# Altium PCB TimePi.PcbDoc
Units mil, origin at the board's own origin, x right, y up, seen from the top; angles counter-clockwise.
Board outline 3149.61 x 1878.5 mil, 4 copper layers (L01_TOP, L02_PWR, L03_PWR, L04_BOT), stack 70.112 mil thick; 86 components, 91 nets, 270 pads, 126 vias.
Unrouted connection lines stored in the file: 74.
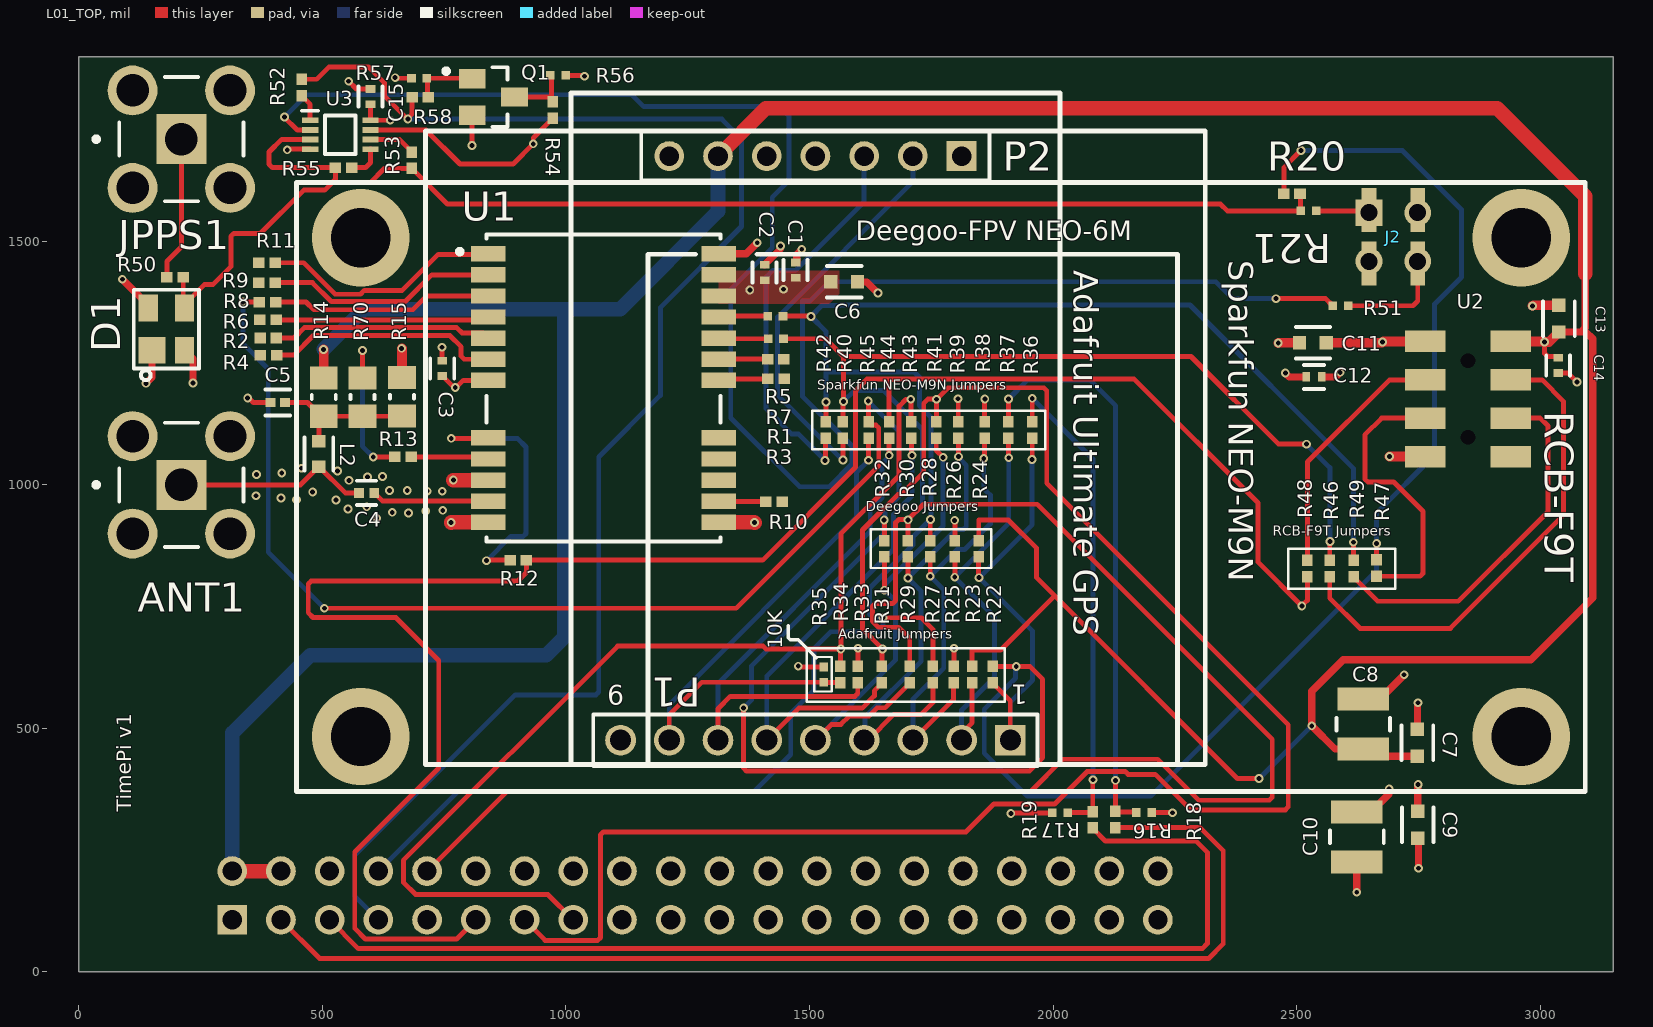
[diagram p0: L01_TOP view]
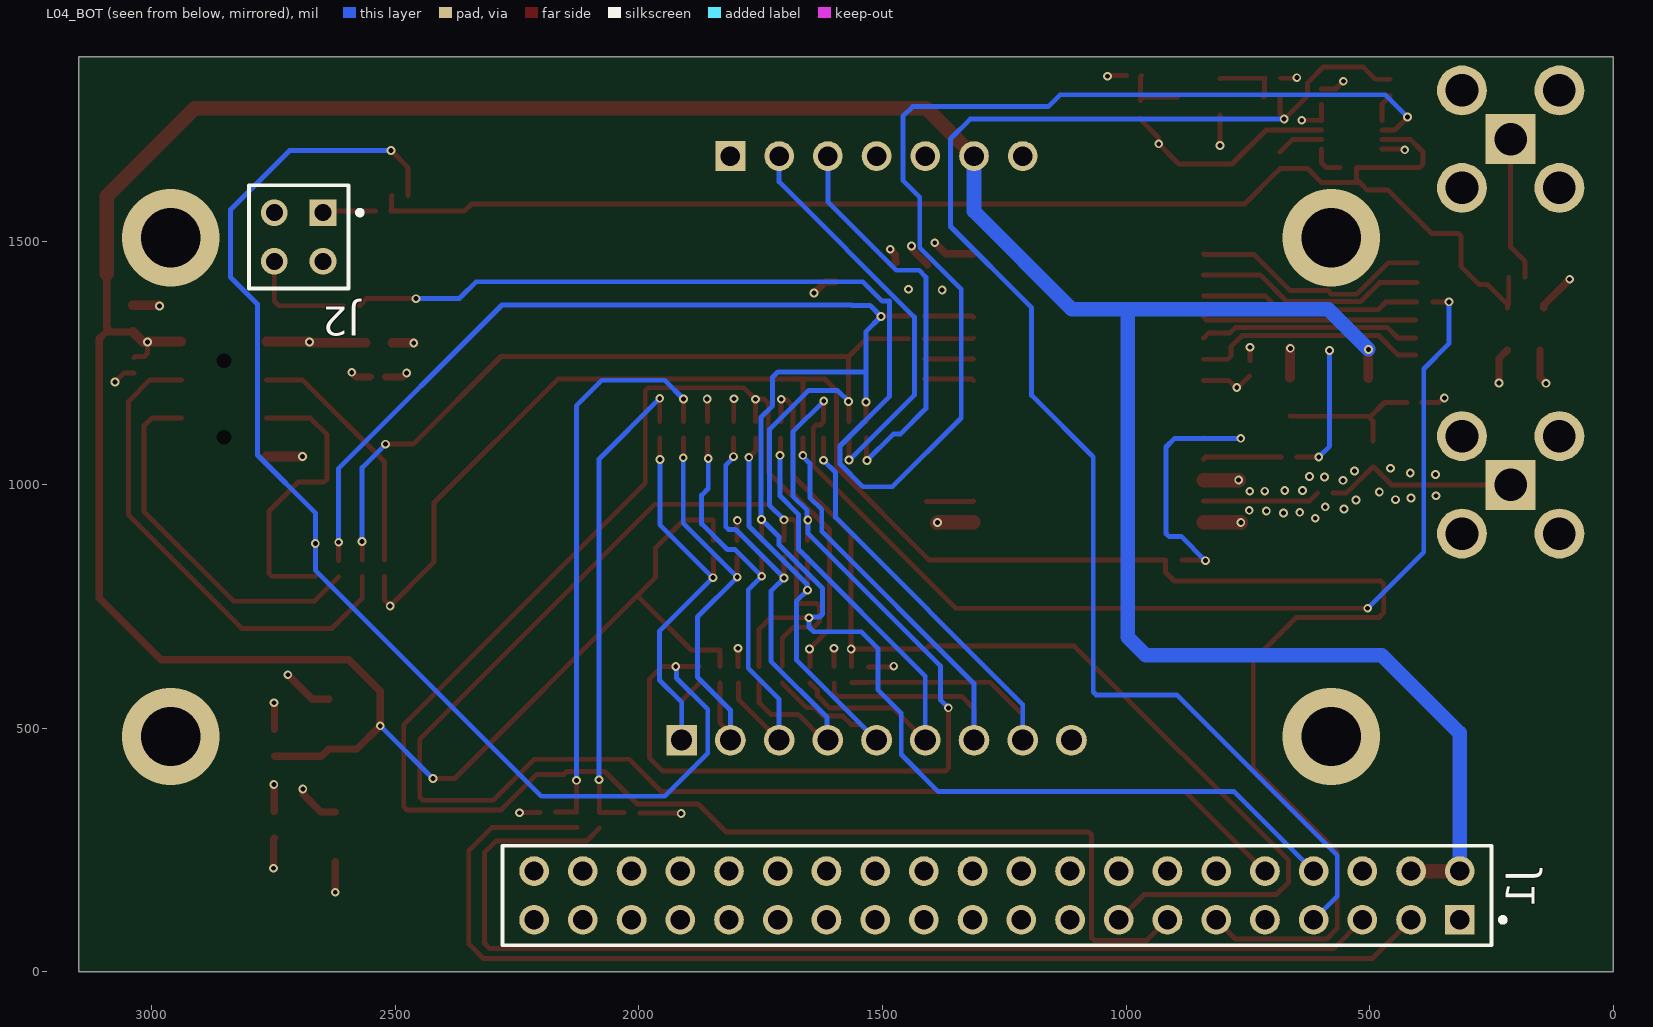
[diagram p1: L04_BOT view, seen from below]
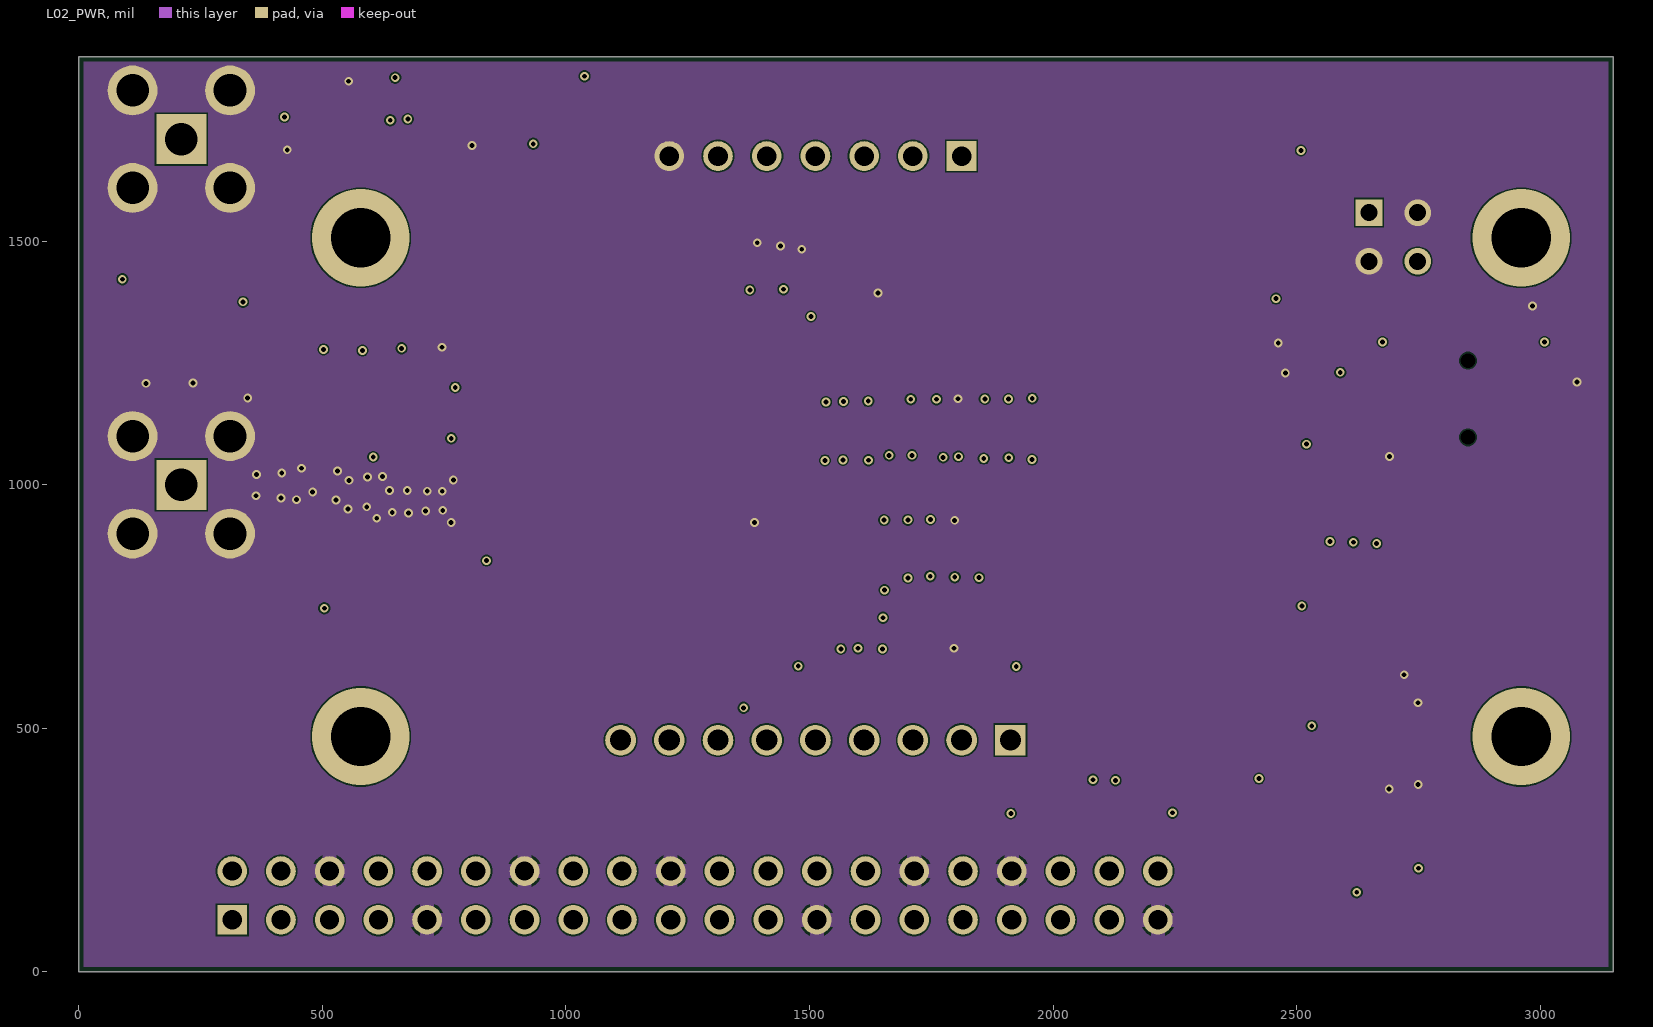
[diagram p2: L02_PWR]
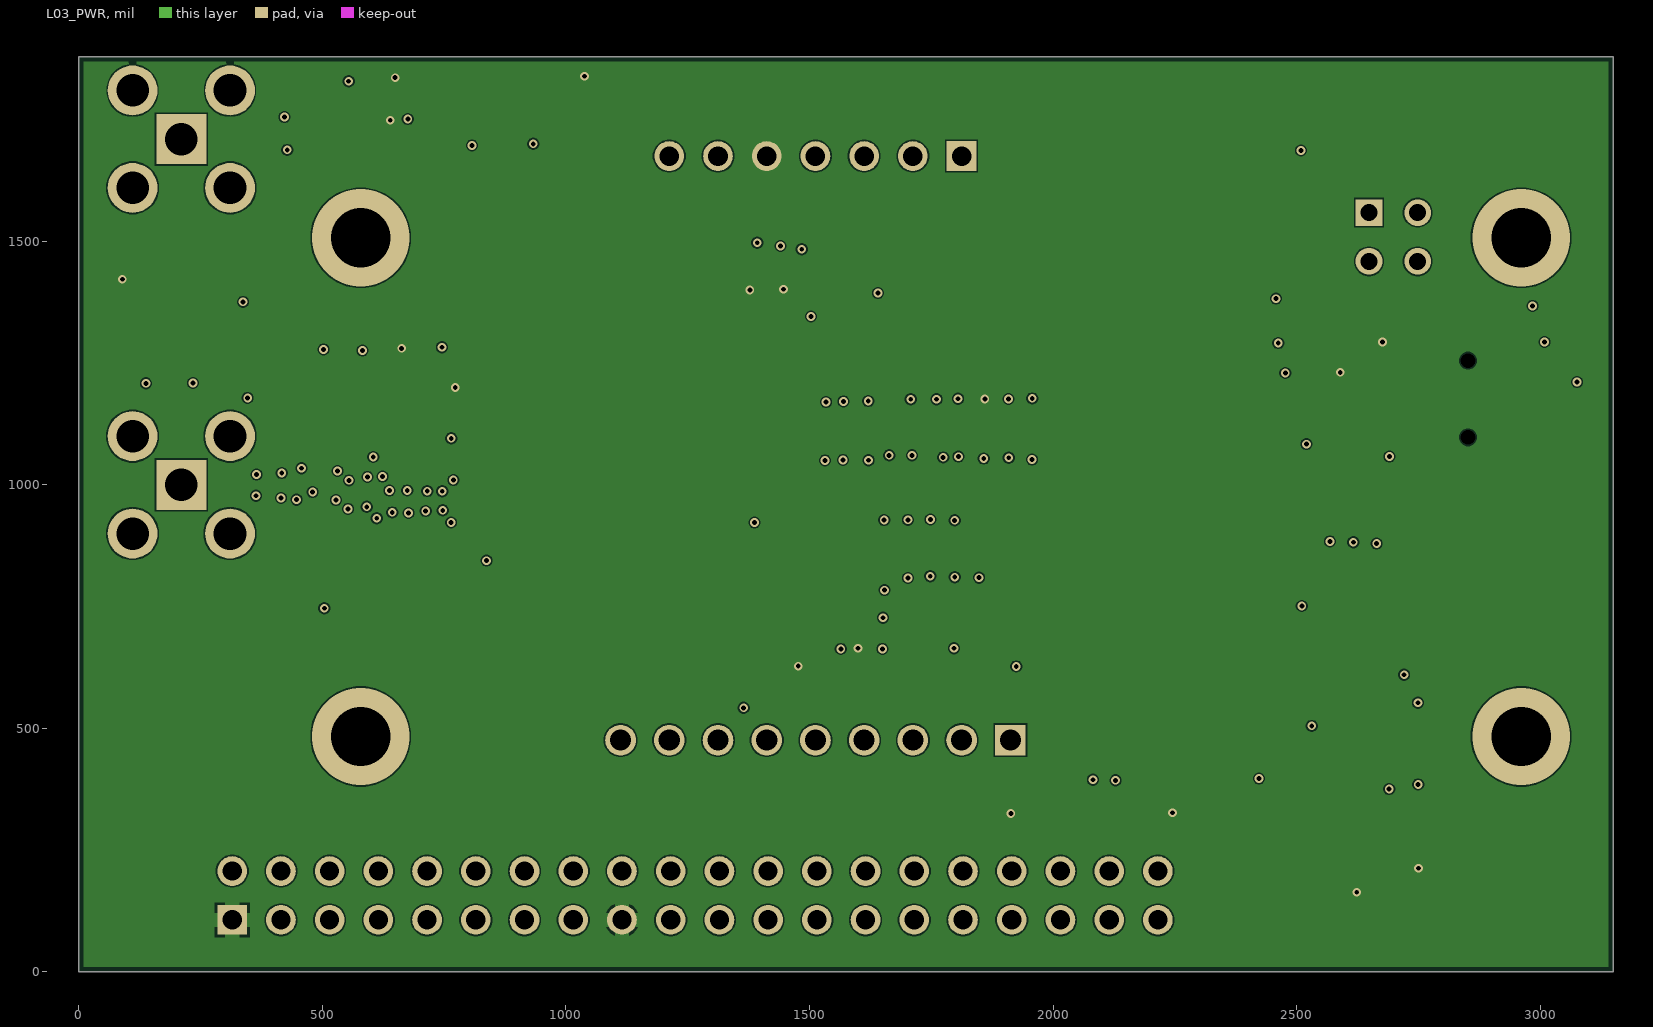
[diagram p3: L03_PWR]

## Layer stack, top to bottom
Top Solder: solder mask 0.6, Solder Resist, Dk 4.1
L01_TOP: signal copper 1.378
Dielectric 2: prepreg 2.8, PP-006, Dk 4.1
L02_PWR: signal copper 1.378
Dielectric 1: core 59, Core-043, Dk 4.3
L03_PWR: signal copper 1.378
Dielectric 3: prepreg 2.8, PP-006, Dk 4.1
L04_BOT: signal copper 1.378
Bottom Solder: solder mask 0.6, Solder Resist, Dk 4.1

## Board outline
0,0 0,1878.5 3149.61,1878.5 3149.61,0

## Design rules (kind name [scope] priority, off if disabled: settings)
AcuteAngle [All] p1: minimum=6.00000000000000E+0001 checktracksonly=FALSE
BoardOutlineClearance [All] p1: gap=10 ignorepadtopadclearanceinfootprint=FALSE
Clearance [All] p1: gap=3 ignorepadtopadclearanceinfootprint=FALSE
HoleSize [All] p1: absolutevalues=TRUE maxlimit=100 minlimit=5.9 maxpercent=80.000 minpercent=20.000
HoleToHoleClearance [All] p1: gap=5.9 allowstackedmicrovias=TRUE
MatchedLengths [InDifferentialPairClass('All Differential Pairs')] p1: tolerance=1 checknetsindiffpair=TRUE checkdiffpairvsdiffpair=FALSE checkxsignals=FALSE checkothers=FALSE
MinimumAnnularRing [All] p1: minimumring=4
MinimumSolderMaskSliver [All] p1: minsoldermaskwidth=3
PlaneClearance [All] p1: clearance=5
PlaneConnect [All] p1: planeconnectstyle=Direct reliefexpansion=20 reliefentries=4 reliefconductorwidth=10 reliefairgap=10
PolygonConnect [All] p1: connectstyle=Direct reliefconductorwidth=10 reliefentries=4 polygonreliefangle="90 Angle" airgapwidth=10
RoutingVias [All] p1: holewidth=10 width=18 viastyle="Through Hole" minholewidth=10 minwidth=18 maxholewidth=50 maxwidth=50
SilkToSilkClearance [All] p1: silktosilkclearance=5
SilkToSolderMaskClearance [IsPad] p1: minsilkscreentomaskgap=4 clearancetoexposedcopper=TRUE
SolderMaskExpansion [All] p1: expansion=4 istentingtop=FALSE
UnRoutedNet [All] p1: checkbadconnections=TRUE
Width [All] p1: maxlimit=50 minlimit=5 preferedwidth=10 minimp=50.000000 maximp=50.000000 favimp=50.000000
22 further rules are at their usual default settings.

## Classes and differential pairs
component class 04-UserIO: C15 D1 JPPS1 Q1 R50 R52 R53 R54 R55 R56 R57 R58 U3

## Components (designator, comment, footprint, x,y, rotation, side; value= is the part's Value field where it differs from the comment)
ANT1 "1053354-1" FP-1053354-1-MFG 210.51,999.84 r0 top
C1 "0.1uF_16V_0402" FP-GRM15-MFG 1471.46,1440.35 r270 top value=0.10μF
C2 "0.1uF_16V_0402" FP-GRM15-MFG 1407.64,1435.65 r270 top value=0.10μF
C3 "0.1uF_16V_0402" FP-GRM15-MFG 746.05,1239.09 r270 top value=0.10μF
C4 "47pF_50V_0402" FP-C0402-BB-MFG 590.74,983.38 r0 top
C5 "10nF_50V_0402" FP-CL165-IPC_C 408.28,1168.86 r180 top
C6 "10uF_16V_0603" FP-0603-L_1_6_0_2-W_0_8_0-MFG 1570.91,1416.8 r0 top
C7 "10uF_16V_0603" FP-0603-L_1_6_0_2-W_0_8_0-MFG 2747.76,470.29 r90 top
C8 "100uF_6.3V_1210" FP-C1210C107M9PACTU-MFG 2636.44,508.68 r270 top
C9 "10uF_16V_0603" FP-0603-L_1_6_0_2-W_0_8_0-MFG 2748.41,302.03 r90 top
C10 "100uF_6.3V_1210" FP-C1210C107M9PACTU-MFG 2623.34,277.23 r270 top
C11 "10uF_16V_0603" FP-0603-L_1_6_0_2-W_0_8_0-MFG 2533.21,1291.51 r180 top
C12 "0.1uF_16V_0402" FP-GRM15-MFG 2535.32,1221.36 r0 top value=0.10μF
C13 "10uF_16V_0603" FP-0603-L_1_6_0_2-W_0_8_0-MFG 3038.2,1341.05 r90 top
C14 "0.1uF_16V_0402" FP-GRM15-MFG 3036.56,1245 r90 top value=0.10μF
C15 "0.1uF_16V_0402" FP-GRM15-MFG 598.86,1796.55 r90 top value=0.10μF
D1 "8240136" SOT143-4L 179.95,1319.45 r90 top
J1 "M20-7832046" FP-M20-7832046-MFG 1264.96,157 r0 bottom
J2 "5-146256-2" FP-5-146256-2-MFG 2698.23,1508.66 r0 bottom
JPPS1 "1053354-1" FP-1053354-1-MFG 210.51,1709.42 r0 top
L2 "LQG18HN27NJ00D_27nH_0603" FP-LQG18HH_00-MFG 492.79,1063.11 r270 top
P1 "61300911121" 61300911121 1512.06,475.82 r180 top locked
P2 "TSW-107-05-G-S" SMTC-TSW-107-05-X-S 1812.06,1674.64 r180 top locked
Q1 "FDV303N" FAIR-FDV303N-3_V 850.83,1796.02 r0 top
R1 "0_5%_0402" RESC1005X40X25NL05T10 1430.52,1257.92 r180 top
R2 "0_5%_0402" RESC1005X40X25NL05T10 389.07,1301.21 r0 top
R3 "0_5%_0402" RESC1005X40X25NL05T10 1430.9,1217.39 r180 top
R4 "0_5%_0402" RESC1005X40X25NL05T10 389.46,1266.15 r0 top
R5 "49.9_1%_0402" RESC1005X40X25LL05T05 1429.78,1346.14 r180 top
R6 "0_5%_0402" RESC1005X40X25NL05T10 388.73,1338.25 r180 top
R7 "49.9_1%_0402" RESC1005X40X25LL05T05 1430.75,1299.61 r180 top
R8 "0_5%_0402" RESC1005X40X25NL05T10 387.3,1375.06 r180 top
R9 "0_5%_0402" RESC1005X40X25NL05T10 386.4,1415.06 r0 top
R10 "0_5%_0402" RESC1005X40X25NL05T10 1426.9,965.6 r0 top
R11 "0_5%_0402" RESC1005X40X25NL05T10 386.19,1455.72 r0 top
R12 "0_5%_0402" RESC1005X40X25NL05T10 902.22,845.41 r180 top
R13 "0_5%_0402" RESC1005X40X25NL05T10 665.47,1057.05 r0 top
R14 "10_1%_0805" RESC2013X60X35ML10T20 502.71,1180 r90 top
R15 "DNI_10_1%_0805" RESC2013X60X35ML10T20 663.29,1180.43 r90 top
R16 "10K_1%_0402" RESC1005X40X25LL05T05 2186.61,327.34 r180 top
R17 "10K_1%_0402" RESC1005X40X25LL05T05 2013.87,326.55 r0 top
R18 "0_5%_0402" RESC1005X40X25NL05T10 2126.99,313.15 r90 top
R19 "0_5%_0402" RESC1005X40X25NL05T10 2081.16,312.49 r90 top
R20 "0_5%_0402" RESC1005X40X25NL05T10 2489.94,1597.6 r0 top
R21 "49.9_1%_0402" RESC1005X40X25LL05T05 2524.17,1562.27 r180 top
R22 "DNI_0_5%_0402" RESC1005X40X25NL05T10 1876.25,610.34 r90 top
R23 "DNI_0_5%_0402" RESC1005X40X25NL05T10 1833.71,610.34 r90 top
R24 "DNI_0_5%_0402" RESC1005X40X25NL05T10 1846.97,868.65 r90 top
R25 "DNI_0_5%_0402" RESC1005X40X25NL05T10 1795.82,610.34 r90 top
R26 "DNI_0_5%_0402" RESC1005X40X25NL05T10 1798.39,868.65 r90 top
R27 "DNI_0_5%_0402" RESC1005X40X25NL05T10 1753.28,610.34 r90 top
R28 "DNI_0_5%_0402" RESC1005X40X25NL05T10 1747.65,868.65 r90 top
R29 "DNI_0_5%_0402" RESC1005X40X25NL05T10 1705.73,610.34 r90 top
R30 "DNI_0_5%_0402" RESC1005X40X25NL05T10 1701.84,868.65 r90 top
R31 "DNI_0_5%_0402" RESC1005X40X25NL05T10 1648.53,610.34 r90 top
R32 "DNI_0_5%_0402" RESC1005X40X25NL05T10 1653.56,868.65 r90 top
R33 "DNI_0_5%_0402" RESC1005X40X25NL05T10 1598.84,610.34 r90 top
R34 "DNI_0_5%_0402" RESC1005X40X25NL05T10 1563.45,610.34 r90 top
R35 "DNI_10K_1%_0402" RESC1005X40X25LL05T05 1528.78,610.34 r90 top
R36 "DNI_0_5%_0402" RESC1005X40X25NL05T10 1957.05,1112.59 r90 top
R37 "DNI_0_5%_0402" RESC1005X40X25NL05T10 1908.24,1112.59 r90 top
R38 "DNI_0_5%_0402" RESC1005X40X25NL05T10 1859.44,1112.59 r90 top
R39 "DNI_0_5%_0402" RESC1005X40X25NL05T10 1805.21,1112.59 r90 top
R40 "DNI_0_5%_0402" RESC1005X40X25NL05T10 1568.48,1112.59 r90 top
R41 "DNI_0_5%_0402" RESC1005X40X25NL05T10 1760.16,1112.59 r90 top
R42 "DNI_0_5%_0402" RESC1005X40X25NL05T10 1532.86,1112.59 r90 top
R43 "DNI_0_5%_0402" RESC1005X40X25NL05T10 1708.86,1112.59 r90 top
R44 "DNI_0_5%_0402" RESC1005X40X25NL05T10 1663.39,1112.59 r90 top
R45 "DNI_0_5%_0402" RESC1005X40X25NL05T10 1621.26,1112.59 r90 top
R46 "0_5%_0402" RESC1005X40X25NL05T10 2567.71,828.2 r270 top
R47 "0_5%_0402" RESC1005X40X25NL05T10 2663.68,828.88 r90 top
R48 "0_5%_0402" RESC1005X40X25NL05T10 2521.8,828.2 r90 top
R49 "0_5%_0402" RESC1005X40X25NL05T10 2616.72,828.02 r90 top
R50 "DNI_0_5%_0402" RESC1005X40X25NL05T10 197.62,1425.98 r180 top
R51 "49.9_1%_0402" RESC1005X40X25LL05T05 2589.96,1367.55 r180 top
R52 "0_5%_0402" RESC1005X40X25NL05T10 458.04,1815.63 r270 top
R53 "0_5%_0402" RESC1005X40X25NL05T10 683.68,1665.9 r270 top
R54 "0_5%_0402" RESC1005X40X25NL05T10 973.15,1768.93 r270 top
R55 "0_5%_0402" RESC1005X40X25NL05T10 543.5,1650.83 r180 top
R56 "10K_1%_0402" RESC1005X40X25LL05T05 983.66,1840.18 r0 top
R57 "10K_1%_0402" RESC1005X40X25LL05T05 698.73,1834.3 r180 top
R58 "0_5%_0402" RESC1005X40X25NL05T10 701.09,1795.46 r0 top
R70 "DNI_10_1%_0805" RESC2013X60X35ML10T20 582.52,1180 r90 top
U1 "NEO-M8N-0" UBX-NEO-M8-24_V 1077.05,1198.59 r0 top locked
U2 "RCB-F9T" GNSS 2851.52,1176.04 r180 top locked
U3 "NC7WV125K8X" SOP50P310X90-8N 536.84,1718.42 r0 top

## Footprints (in the part's own frame and the unit in brackets; to place one, negate y for a bottom-side part, rotate by r counter-clockwise, add the part's x,y. Pads: shape width x height; smd on the part's side, far side on the other; paste and mask are expansions set on the pad)
61300911121 [mm] "Pin Header, pitch 2.54 mm, THT, Vertical, single row, 9p"
  rect 1.6x1.6 hole 1.1: 1(-10.16,0)
  round 1.6 hole 1.1: 2(-7.62,0) 3(-5.08,0) 4(-2.54,0) 5(0,0) 6(2.54,0) 7(5.08,0) 8(7.62,0) 9(10.16,0)
  silkscreen extent -11.58,-1.35 11.58,1.35, body extent -11.43,-1.27 11.43,1.27, height 8.57
FAIR-FDV303N-3_V [mm] "SOT23, 3-Leads, Body 3.12x1.50mm, Pitch 0.95mm"
  rect 1.4x1 smd: 1(-1.1,0.95) 2(-1.1,-0.95) 3(1.1,0)
  silkscreen extent -2.58,-1.55 0.75,1.55, body extent -0.75,-1.56 0.75,1.56, height 1.2
FP-5-146256-2-MFG [mm]
  rect 0.76x2.29 smd far side paste+0 mask+0: 1(-1.27,-1.395) 2(-1.27,1.395) 3(1.27,-1.395) 4(1.27,1.395)
  rect 1.39x1.39 hole 0.89 paste-1000 mask+0: 1(-1.27,-1.27)
  silkscreen extent -3.31,-2.7 2.59,2.7, body extent -2.34,-2.44 2.34,2.44, height 8.72
FP-0603-L_1_6_0_2-W_0_8_0-MFG [mm]
  rect 0.7x0.7 smd paste+0 mask+0: 1(-0.7,0) 2(0.7,0)
  silkscreen extent -0.9,-0.82 0.9,0.82, body extent -1.15,-0.6 1.15,0.6, height 0.25
FP-1053354-1-MFG [mm]
  rect 2.6x2.6 hole 1.7 paste-1000 mask+0: 1(0,0)
  round 2.6 hole 1.7 paste-1000 mask+0: 2(-2.54,2.54) 3(2.54,2.54) 4(-2.54,-2.54) 5(2.54,-2.54)
  silkscreen extent -4.56,-3.24 3.24,3.24, body extent -3.94,-3.94 3.94,3.94, height 0.25
FP-C0402-BB-MFG [mm]
  rect 0.52x0.52 smd paste+0 mask+0: 1(-0.4,0) 2(0.4,0)
  silkscreen extent -0.5,-0.64 0.5,0.64, body extent -0.8,-0.4 0.8,0.4, height 0.25
FP-C1210C107M9PACTU-MFG [mm]
  rect 1.2x2.7 smd paste+0 mask+0: 1(-1.3,0) 2(1.3,0)
  silkscreen extent -0.33,-1.4 0.33,1.4, body extent -2,-1.5 2,1.5, height 0.25
FP-CL165-IPC_C [mil]
  rect 20.29x18.6 smd paste+0 mask+0: 1(-14.9,0) 2(14.9,0)
  silkscreen extent -25,-27 25,27, body extent -29,-15 29,15, height 10
FP-GRM15-MFG [mm]
  rect 0.4x0.5 smd paste+0 mask+0: 1(-0.4,0) 2(0.4,0)
  silkscreen extent -0.53,-0.63 0.53,0.63, body extent -0.7,-0.38 0.7,0.38, height 0.25
FP-LQG18HH_00-MFG [mm]
  rect 0.65x0.7 smd paste+0 mask+0: 1(-0.675,0) 2(0.675,0)
  silkscreen extent -0.87,-0.75 0.87,0.75, body extent -1.1,-0.58 1.1,0.58, height 0.25
FP-M20-7832046-MFG [mm]
  rect 1.55x1.55 hole 1 paste-1000 mask+0: 1(-24.13,1.27)
  round 1.55 hole 1 paste-1000 mask+0: 2(-24.13,-1.27) 3(-21.59,1.27) 4(-21.59,-1.27) 5(-19.05,1.27) 6(-19.05,-1.27) 7(-16.51,1.27) 8(-16.51,-1.27) 9(-13.97,1.27) 10(-13.97,-1.27) 11(-11.43,1.27) 12(-11.43,-1.27) 13(-8.89,1.27) 14(-8.89,-1.27) 15(-6.35,1.27) 16(-6.35,-1.27) 17(-3.81,1.27) 18(-3.81,-1.27) 19(-1.27,1.27) 20(-1.27,-1.27) 21(1.27,1.27) 22(1.27,-1.27) 23(3.81,1.27) 24(3.81,-1.27) 25(6.35,1.27) 26(6.35,-1.27) 27(8.89,1.27) 28(8.89,-1.27) 29(11.43,1.27) 30(11.43,-1.27) 31(13.97,1.27) 32(13.97,-1.27) 33(16.51,1.27) 34(16.51,-1.27) 35(19.05,1.27) 36(19.05,-1.27) 37(21.59,1.27) 38(21.59,-1.27) 39(24.13,1.27) 40(24.13,-1.27)
  silkscreen extent -26.5,-2.6 25.78,2.6, body extent -25.6,-2.52 25.6,2.52, height 8.61
GNSS [mm]
  round 0 hole 0.76: 0(0,2) 0(0,-2)
  rect 2.105x1.12 smd: 1(-2.222,-3) 2(2.223,-3) 3(-2.222,-1) 4(2.223,-1) 5(-2.222,1) 6(2.223,1) 7(-2.222,3) 8(2.223,3)
  silkscreen extent -6.11,-11.28 61.07,20.47, body extent -2.78,-3.85 2.78,4.15, height 4.32
RESC1005X40X25LL05T05 [mm] "Chip Resistor, 2-Leads, Body 1.00x0.50mm, IPC High Density"
  rect 0.45x0.45 smd: 1(-0.4,0) 2(0.4,0)
  body extent -0.53,-0.27 0.53,0.28, height 0.4
RESC1005X40X25NL05T10 [mm] "Chip Resistor, 2-Leads, Body 1.00x0.50mm, IPC Medium Density"
  rect 0.6x0.55 smd: 1(-0.425,0) 2(0.425,0)
  body extent -0.53,-0.27 0.53,0.28, height 0.4
RESC2013X60X35ML10T20 [mm] "Chip Resistor, 2-Leads, Body 2.1x1.35mm, IPC Low Density"
  rect 1.2x1.45 smd: 1(-1,0) 2(1,0)
  silkscreen extent -0.1,-0.63 0.1,0.63, body extent -1.05,-0.68 1.05,0.67, height 0.6
SMTC-TSW-107-05-X-S [mm] ".025 SQ Post Terminal Strip Assembly, 1x7 Pins, Vertical, 2.54mm Pitch, Male"
  rect 1.55x1.55 hole 1.02: 1(0,0)
  round 1.55 hole 1.02: 2(2.54,0) 3(5.08,0) 4(7.62,0) 5(10.16,0) 6(12.7,0) 7(15.24,0)
  silkscreen extent -1.46,-1.27 16.7,1.27, body extent -1.27,-1.27 16.51,1.27, height 5.21
SOP50P310X90-8N [mm]
  rect 0.85x0.3 smd: 1(-1.575,0.75) 2(-1.575,0.25) 3(-1.575,-0.25) 4(-1.575,-0.75) 5(1.575,-0.75) 6(1.575,-0.25) 7(1.575,0.25) 8(1.575,0.75)
  silkscreen extent -2,-1 0.8,1.25, body extent -1.55,-1 1.55,1, height 0.9
SOT143-4L [mm] "SOT143-4L, 4-Leads, Body 2.95x2.4mm, Pitch 1.70/1.90mm"
  rect 1.4x1.4 smd: 1(-1.1,0.75)
  rect 1.4x1 smd: 2(-1.1,-0.95) 3(1.1,-0.95) 4(1.1,0.95)
  silkscreen extent -2.66,-1.7 2.05,1.7, body extent -1.2,-1.46 1.2,1.46, height 1.03
UBX-NEO-M8-24_V [mm] "SMD, 24-Leads, Body 16x12.2mm, Pitch 1.1mm"
  rect 1.8x0.8 smd: 1(-6,7) 2(-6,5.9) 3(-6,4.8) 4(-6,3.7) 5(-6,2.6) 6(-6,1.5) 7(-6,0.4) 8(-6,-2.6) 9(-6,-3.7) 10(-6,-4.8) 11(-6,-5.9) 12(-6,-7) 13(6,-7) 14(6,-5.9) 15(6,-4.8) 16(6,-3.7) 17(6,-2.6) 18(6,0.4) 19(6,1.5) 20(6,2.6) 21(6,3.7) 22(6,4.8) 23(6,5.9) 24(6,7)
  silkscreen extent -7.62,-8 6.1,8, body extent -6.1,-8 6.1,8, height 2.6

## Part data
ANT1 JPPS1: library part CMP-2000-05830-2, "CONN SMA JACK STR 50 OHM PCB", Case/Package=SMA, Dielectric Material=PTFE, Frequency=18GHz, Housing Color=Gold, Max Frequency=12.4GHz, Operating Frequency=N/A, Package Quantity=125, Body Material="Stainless Steel", Body Plating=Gold, Center Contact Plating=Gold, Connector Type=SMA, Contact Material=Copper, Contact Plating=Gold, Depth=6.3mm, Fastening Type=Threaded, Gender=Female, Height=9.5mm, Impedance=50R, Insulation Material=Polytetrafluoroethylene, Length=9.53mm, Mating Cycles=500, Mount="Through Hole", Number of Ports=1, Orientation=Straight, Packaging=Bag, PCB Mounting Orientation=Vertical, Plating=Gold, Polarity=Normal, Radiation Hardening=No, REACH SVHC="No SVHC", RoHS Compliant=Yes, Series=SMA, Termination=Solder
C1 C2 C3 C12 C14 C15: library part CMP-2100-03641-2, "CAP CER 0.1UF 16V X7R 0402", Capacitance=0.10μF, Manufacturer=Murata, Manufacturer Part Number=GRM155R71C104KA88D, Package=GRM15, Temperature="-55°C to +125°C", Temperature Characteristic=X7R, Temperature Range High=+125°C, Temperature Range Low=-55°C, Tolerance=10%, Voltage Rating=16Vdc, Category=Cap, ComponentLink2Description=Datasheet, ComponentLink2URL=https://search.murata.co.jp/Ceramy/image/img/A01X/G101/ENG/GRM155R71H471KA01-01A.pdf, Device Class L1="Passive Components", Device Class L2=Capacitors, Device Class L3="Ceramic Capacitors", Digikey Description="CAP CER 0.1UF 16V X7R 0402", Height=0.55mm, Ipc Land Pattern Name=CAPC10050X219, Lead Free=yes, Material=Ceramic, Mouser Description="0402 0.1 uF 16V ±10 % Tolerance X7R SMT Multilayer Ceramic Capacitor", Octopart=https://octopart.com/grm155r71c104ka88d-murata-196880, RoHS=TRUE, Standoff Height=0mm
C4: library part CMP-2008-03283-3, "CAP CER 47PF 50V C0G/NP0 0402", Capacitance=47pF, Case Code (Imperial)=0402, Case Code (Metric)=1005, Dielectric=C0G, Dielectric Material=Ceramic, Max Operating Temperature=125°C, Min Operating Temperature=-55°C, Package Quantity=1, Temperature Coefficient=30ppm/°C, Tolerance=5%, Voltage=50V, Case/Package=0402, Construction=Flat, Contact Plating=Tin, Depth=0.5mm, Height=0.5mm, Lead Free="Lead Free", Lead Pitch=0.3mm, Length=1mm, Mount="Surface Mount", Number of Pins=2, Packaging="Tape and Reel", Radiation Hardening=No, REACH SVHC="No SVHC", RoHS Compliant=Yes, Series=C, Termination=SMD/SMT, Thickness=0.022inch, Voltage Rating=50V, Voltage Rating (DC)=50V, Width=0.02inch
C5: library part CMP-13271-000387-1, "Cap Ceramic 10nF 50V X7R ±10% SMD 0402 +125°C Paper T/R", Capacitance=10nF, Case Code (Imperial)=0402, Case Code (Metric)=1005, Dielectric=X7R, Max Operating Temperature=125°C, Min Operating Temperature=-55°C, Package Quantity=1, Tolerance=10%, Voltage=50V, Case/Package=0402, Contact Plating=Tin, Depth=0.5mm, Height=0.5mm, Lead Free="Lead Free", Length=1mm, Material=Ceramic, Mount="Surface Mount", Packaging="Tape and Reel", Radiation Hardening=No, Thickness=0.022inch, Voltage Rating=50V, Voltage Rating (DC)=50V, Width=0.02inch
C6 C7 C9 C11 C13: library part CMP-2000-06226-4, "Multilayer Ceramic Capacitor 10uF 16V X5R 20% SMD 0603 T/R", Capacitance=10uF, Case Code (Imperial)=0603, Case Code (Metric)=1608, Dielectric=X5R, Max Operating Temperature=85°C, Min Operating Temperature=-55°C, Package Quantity=1, Tolerance=20%, Voltage Rating=16V, Case/Package=0603, Construction=Flat, Halogen Free="Halogen Free", Height=0.8mm, Length=0.063inch, Mount="Surface Mount", Packaging="Tape and Reel", RoHS Compliant=Yes, Series=M, Termination=SMD/SMT, Thickness=0.031inch, Voltage Rating (DC)=16V, Width=0.031inch
C8 C10: library part CMP-2000-06018-2, "CAP CER 100UF 6.3V X5R 1210", Capacitance=100uF, Case Code (Imperial)=1210, Case Code (Metric)=3225, Dielectric=X5R, Dielectric Material=Ceramic, Max Operating Temperature=85°C, Min Operating Temperature=-55°C, Package Quantity=1, Tolerance=20%, Voltage=6.3V, Case/Package=1210, Construction=Flat, Contact Plating=Tin, Depth=2.5mm, Dissipation Factor=5%, Height=2.5mm, Lead Free="Lead Free", Length=3.2mm, Mount="Surface Mount", Number of Pins=2, Packaging="Tape and Reel", Radiation Hardening=No, REACH SVHC="No SVHC", RoHS Compliant=Yes, Series=C, Termination=SMD/SMT, Thickness=0.11inch, Voltage Rating=6.3V, Voltage Rating (DC)=6.3V, Width=2.5mm
D1: library part CMP-1486-00002-1, "TVS Diode WE-TVS-HS, VRWM=3.3V", Manufacturer="Wuerth Elektronik", Reverse Stand Off Voltage=3.3V, ComponentLink1Description="Manufacturer URL", ComponentLink1URL=http://www.we-online.com, ComponentLink2Description=Datasheet, ComponentLink2URL=http://katalog.we-online.de/kataloge/eisos/media/pdf/8240136.pdf, PackageReference=SOT143-4L, PartNumber=8240136
J1: library part CMP-15831-000036-1, "CONN RCPT 40POS 0.1 TIN PCB", Color=Black, Contact Resistance=20mR, Current Rating=3A, Insulation Resistance=1MR, Max Operating Temperature=105°C, Min Operating Temperature=-40°C, Package Quantity=11, Connector Type=Receptacle, Contact Gender=Female, Contact Material=Bronze, Contact Plating=Tin, Contact Type="Female Socket", Depth=5.04mm, Gender=Receptacle, Hole Diameter=0.8mm, Housing Color=Black, Housing Material=Polyamide, Lead Pitch=2.54mm, Length=51.2mm, Material=Glass, Mating Cycles=50, Max Current Rating=3A, Mount="Through Hole", Number Of Contacts=40, Number of Positions=40, Number of Rows=2, Orientation=Straight, Packaging=Rail/Tube, Pitch=2.54mm, Radiation Hardening=No, REACH SVHC="No SVHC", RoHS Compliant=Yes, Row Spacing=0.1inch, Series=M20, Termination=Solder
J2: library part CMP-03369-000128-1, "CONN HEADER VERT 4POS 2.54MM", Color=Black, Contact Current Rating=3A, Flammability Rating="UL94 V-0", High Temperature Housing=Yes, Insulation Resistance=5GR, Max Operating Temperature=105°C, Min Operating Temperature=-65°C, Package Quantity=500, Voltage Rating=750V, Approvals=CSA, Board Standoff="Yes (With)", Connector Type=Plug, Contact Gender=Male, Contact Material=Bronze, Contact Mating Length=0.23inch, Contact Plating=Gold, Contact Post Length=0.12inch, Contact Protection="No (Without)", Contact Shape=Square, Contact Type="Male Pin", Current Rating=3A, Depth=4.88mm, Gasket="No (Without)", High Speed Serial Data Connector=No, Housing Color=Black, Housing Material=Thermoplastic, Keyed=No, Length=4.67mm, Mating Alignment="No (Without)", Mating Connector Lock="No (Without)", Mount="Through Hole", Number Of Contacts=4, Number of Positions=4, Number of Rows=2, Orientation=Straight, Packaging=Carton, PCB Mount Retention=Without, PCB Mounting Orientation=Vertical, PCB Thickness=0.062inch, Pitch=2.54mm, Radiation Hardening=No, RoHS Compliant=Yes, Row Spacing=2.54mm, Selectively Loaded="No (Without)", Series="AMPMODU MOD II", Stabilizers="No (Without)", Strain Relief="No (Without)", Termination="Through Hole"
L2: library part CMP-06042-005497-1, "Multilayer type RF Inductor 27nH ±5% 0.54Ω 500mA 0603", Case Code (Imperial)=0603, Case Code (Metric)=1608, Current Rating=300mA, DC Resistance (DCR)=550mR, Inductance=27nH, Inductance Tolerance=5%, Max Operating Temperature=85°C, Min Operating Temperature=-55°C, Package Quantity=4000, Self Resonant Frequency=2GHz, Test Frequency=100MHz, Case/Package=0603, Core Material=Air, DC Current=300mA, Depth=0.95mm, Height=0.8mm, Height - Seated (Max)=0.037inch, Lead Free="Lead Free", Length=0.063inch, Max DC Current=300mA, Military Standard=Not, Mount="Surface Mount", Packaging="Tape and Reel", Q Factor=12, Radiation Hardening=No, REACH SVHC="No SVHC", Shielding=Unshielded, Termination=SMD/SMT, Tolerance=5%, Width=0.8mm
P1: library part CMP-1502-01080-1, "THT Vertical Pin Header WR-PHD, Pitch 2.54 mm, Single Row, 9 pins", Contact Resistance=20mOhm, Manufacturer="Wurth Elektronik", Operating Temperature=-40to105degC, Rated Current=3A, Withstanding Voltage=500VAC, Working Voltage=250VAC, Datasheet URL=https://katalog.we-online.de/em/datasheet/6130xx11121.pdf, Gender=Male, Manufacturer URL=http://www.we-online.de, Mounting Technology=THT, Orientation=Vertical, Package Reference=61300911121, Packaging=Bag, Part Number=61300911121, Pin Number=9, Pitch=2.54mm, Publisher=WurthElektronik, Row Number=Single
P2: library part CMP-1024-00400-1, "0.025\" SQ Post Header, Through-hole, Vertical, -55 to 125 degC, 2.54 mm Pitch, 7-Pin, Male, RoHS", Manufacturer=Samtec, Temperature Range="-55 to 125 degC", ComponentLink1Description="Manufacturer URL", ComponentLink1URL=http://www.samtec.com, ComponentLink2Description=Datasheet, ComponentLink2URL=http://www.samtec.com/documents/webfiles/pdf/TSW_TH.PDF, ComponentLink3Description="Package Specification", ComponentLink3URL=http://www.samtec.com/documents/webfiles/cpdf/TSW-XXX-XX-XXX-X-XX-XXX-MKT.pdf, DatasheetVersion=F-214, Mounting Technology=Through-hole, Orientation=Vertical, PackageDescription=".025[0.64] SQ. Post Terminal Strip Assembly", PackageReference=TSW-107-05-X-S, PackageVersion="DM, 8/1988", PartNumber=TSW-107-05-G-S, Pitch="2.54 mm", RoHS=True
Q1: library part CMP-2000-05111-1, "N-Channel MOSFET Transistor, 8 V VGSS, 25 V VDSS, 0.68 A, -55 to 150 degC, 3-Pin SOT23, RoHS, Tape and Reel", Manufacturer=Fairchild, Maximum Continuous Drain Current=0.68A, Maximum Drain Source Voltage=25V, Maximum Gate Source Voltage=8V, Operating Temperature=-55to150degC, Package=3SOT-23, Category=MOSFET, Channel Mode=Enhancement, Channel Type=N, Datasheet URL=https://datasheet.ciiva.com/22681/1845307-22681736.pdf, Datasheet Version="Rev. D2, 07/2014", Manufacturer URL=https://www.fairchildsemi.com/, Mounting=SurfaceMount, Packaging=Tape&Reel, Rad Hard=No, RDS-on=450@4.5VmOhm, Typical Fall Time=13ns, Typical Rise Time=8.5ns, Typical Turn-Off Delay Time=17ns, Typical Turn-On Delay Time=3ns
R1 R2 R3 R4 R6 R8 R9 R10 R11 R12 R13 R18 R19 R20 R22 R23 R24 R25 R26 R27 R28 R29 R30 R31 R32 R33 R34 R36 R37 R38 R39 R40 R41 R42 R43 R44 R45 R46 R47 R48 R49 R50 R52 R53 R54 R55 R58: library part CMP-1011-00001-2, Manufacturer="Yageo / Phycomp", Part Number=RC0402JR-070RL
R5 R7 R21 R51: library part CMP-2002-00039-1, Manufacturer="Vishay Dale", Part Number=CRCW040249K9FKED
R14 R15 R70: library part CMP-2100-03670-1, "Chip Resistor, 10 Ohm, +/- 1%, 0.125 W, -55 to 155 degC, 0805 (2012 Metric), RoHS, Tape and Reel", Case Code (Imperial)=0805, Case Code (Metric)=2012, Manufacturer=Yageo, Max Operating Temperature=155degC, Max Power Dissipation=125mW, Min Operating Temperature=-55degC, Package Description="2-Pin Surface Mounted Device, Body 2 x 1.25 mm", Package Quantity=1, Resistance=10Ohm, Temperature Coefficient=200ppm/degreesC, Tolerance=1%, Voltage Rating=150V, Case/Package=0805, Composition=ThickFilm, Datasheet URL=http://www.yageo.com/NewPortal/yageodocoutput?fileName=/pdf/R-Chip/PYu-RC_Group_51_RoHS_L_5.pdf, Datasheet Version="Rev. 5, 10/2016", Depth=1.25mm, Height=0.5mm, Lead Free=LeadFree, Length=2mm, Manufacturer URL=http://www.yageo.com/, Number of Pins=2, Number of Terminations=2, Package Reference=0805, Packaging=TapeandReel, Power Rating=125mW, REACH SVHC=NoSVHC, RoHSCompliant=true, Termination=SMD/SMT, Voltage Rating (DC)=150V, Width=1.25mm
R16 R17 R35 R56 R57: library part CMP-2000-07588-1, "Chip Resistor, 10 KOhm, +/- 1%, 0.1 W, -55 to 155 degC, 0402 (1005 Metric), RoHS, Tape and Reel", Case Code (Imperial)=0402, Case Code (Metric)=1005, Manufacturer=Panasonic, Max Operating Temperature=155degC, Max Power Dissipation=100mW, Min Operating Temperature=-55degC, Package Description="2-Pin Surface Mount Device, Body 1 x 0.5 mm", Package Quantity=1, Package Reference=402, Resistance=10KOhm, Temperature Coefficient=100ppm\/degreesC, Tolerance=1%, Voltage Rating=50V, Case\/Package=0402, Composition=ThickFilm, Contact Plating=Tin, Datasheet URL=https://industrial.panasonic.com/cdbs/www-data/pdf/RDA0000/AOA0000C304.pdf, Datasheet Version=02/2017, Depth=0.5mm, Height=0.35mm, Lead Free=LeadFree, Length=1mm, Manufacturer URL=http://www.panasonic.com/, Military Standard=Not, Mount=SurfaceMount, Mounting Technology=SurfaceMount, Number of Pins=2, Number of Terminations=2, Packaging=TapeandReel, Power Rating=100mW, Radiation Hardening=No, REACH SVHC=NoSVHC, RoHSCompliant=True, Termination=SMD/SMT, Voltage Rating (DC)=50V, Width=0.02inch
U1: library part CMP-2000-07559-1, "U-Blox M8 Concurrent Gnss Module, 3.6 V, -40 to 85 degC, 24-Pin SMD, RoHS, Tape and Reel", Manufacturer=U-Blox, Package Description="24-Pin Surface Mount Device, Body 16 x 12.2 mm, Pitch 1.1 mm", Datasheet URL=https://www.u-blox.com/sites/default/files/NEO-M8-FW3_DataSheet_%28UBX-15031086%29.pdf, Datasheet Version="Rev. R03, 08/2016", Manufacturer URL=https://www.u-blox.com/en, Mounting Technology=SurfaceMount, Package Reference=NEO-M8N-0, Package URL=https://www.u-blox.com/sites/default/files/NEO-8Q-NEO-M8-FW3_HardwareIntegrationManual_%28UBX-15029985%29.pdf, RoHSCompliant=False
U2: "MOD, GPS", MAXTEMP=80C, MINTEMP=-40C, Supplier Part Number 1=672-RCB-F9T-ND, VELENTIUM PART NUM="<V PART NUM>", Category=MOD, DESC="MOD BLE 4.2", MFG Name=UBLOCKS, MFG PART NUM=RCB-F9T, MODIFY DATE=9/11/13, P1=GPS, Supplier 1=Digi-Key
U3: "Integrated Circuit", Manufacturer_Name="ON Semiconductor", Mouser Part Number=512-NC7WV125K8X, Arrow Part Number=NC7WV125K8X, Arrow Price/Stock=https://www.arrow.com/en/products/nc7wv125k8x/on-semiconductor, Datasheet Link=https://www.mouser.com/datasheet/2/308/NC7WV125-1301459.pdf, Height=0.9mm, Manufacturer_Part_Number=NC7WV125K8X, Mouser Price/Stock=https://www.mouser.com/Search/Refine.aspx?Keyword=512-NC7WV125K8X

## Via types
v1: diameter 18, hole 10, L01_TOP to L04_BOT, 119 vias
v2: diameter 200, hole 122, L01_TOP to L04_BOT, 4 vias
v3: diameter 54.72, hole 35.04, L01_TOP to L04_BOT, 3 vias

## Nets (pads, with @x,y where several pads share a name; then routed paths per layer and width w, separated by ;. In a path a pad name is that pad's centre, name@x,y a point inside that pad or via, vN(x,y) a via of type N, cw(c..) or ccw(c..) an arc to the next point about the centre after c; other vN are vias at no path point)
9PIN_1: P1.1 R22.1 R24.1 R36.1 | length 905.2
  L01_TOP w10: R24.1 1846.97,810.38 v1(1848.04,809.32) ; R22.1 1876.25,592.62 1912.06,556.81 P1.1 ; v1(1956.72,1051.66) 1957.05,1051.99 R36.1
  L04_BOT w10: P1.1 1912.06,553.69 1957.72,599.35 1957.72,699.64 v1(1848.04,809.32) 1956.72,918 v1(1956.72,1051.66)
9PIN_2: P1.2 R23.1 R26.1 R37.1 | length 896.5
  L01_TOP w10: v1(1798.08,810.33) 1798.39,810.63 R26.1 ; P1.2 1812.06,490.16 1833.71,511.81 R23.1 ; R37.1 1908.24,1055.93 v1(1908.79,1055.38)
  L04_BOT w10: P1.2 1812.06,537.67 1879.81,605.41 1879.81,728.61 v1(1798.08,810.33) 1908.79,921.04 v1(1908.79,1055.38)
9PIN_3: P1.3 R25.1 R28.1 R38.1 | length 916.7
  L01_TOP w10: P1.3 1795.82,559.58 R25.1 ; R28.1 1747.65,812.49 v1(1747.79,812.35) ; v1(1857.49,1053.69) 1859.44,1055.64 R38.1
  L04_BOT w10: P1.3 1712.06,560 1775.56,623.49 1775.56,784.59 v1(1747.79,812.35) 1802.27,866.83 1818.09,866.83 1871.03,919.78 1871.03,978.88 1857.49,992.42 v1(1857.49,1053.69)
9PIN_4: P1.4 R27.1 R30.1 R39.1 | length 1001.5
  L01_TOP w10: P1.4 1620.24,475.82 1673.2,528.78 1729.18,528.78 1753.28,552.88 R27.1 ; v1@1701.86,808.67 R30.1@1701.86,851.9 ; R39.1 1805.36,1095.71 1805.36,1057.89 v1(1805.51,1057.74)
  L04_BOT w10: P1.4 1613.48,477.24 1613.48,522.32 1728.92,637.76 1728.92,781.61 v1(1701.89,808.64) 1801.58,908.33 1815.79,908.33 1821.65,914.19 1821.65,1039.94 1805.51,1056.08 v1(1805.51,1057.74)
9PIN_5: P1.5 R29.1 R32.1 R41.1 | length 1064.8
  L01_TOP w10: P1.5 1512.99,475.82 1545.4,508.24 1564.17,508.24 1581.22,525.28 1621.72,525.28 1638.77,542.33 1655.44,542.33 1705.73,592.62 R29.1 ; R32.1 1653.71,851.77 1653.71,783.84 v1(1653.86,783.7) ; R41.1 1760.16,1070.35 v1(1774.24,1056.27)
  L04_BOT w10: P1.5 1676.74,640.5 1676.74,760.81 v1(1653.86,783.7) 1655.15,785 1655.15,796.34 1774.24,915.42 v1(1774.24,1056.27)
9PIN_6: P1.6 R31.1 R43.1 | length 1036.2
  L01_TOP w10: P1.6 1477.89,541.65 1608.05,541.65 1633.03,566.63 1633.03,577.12 1648.53,592.62 R31.1 ; R43.1 1709.59,1095.13 1709.59,1061.17 v1(1710.32,1060.44)
  L04_BOT w10: P1.6 1412.06,607.1 1672.1,867.14 1672.1,938.84 1710.32,977.07 v1(1710.32,1060.44)
9PIN_7: P1.7 R33.1 R44.1 | length 1151.9
  L01_TOP w10: P1.7 1312.06,540.33 1337.35,565.62 1592.99,565.62 1598.84,571.48 R33.1 ; v1(1663.41,1060.44) R44.1
  L04_BOT w10: P1.7 1312.06,591.8 1624.67,904.41 1624.67,949.4 1648.81,973.54 1648.81,1043.68 1663.41,1058.27 v1(1663.41,1060.44)
9PIN_8: P1.8 R34.1 R35.1 R45.1 | length 1220.9
  L01_TOP w10: P1.8 1212.06,527.75 1278.9,594.59 R35.1 1529.27,594.1 1562.96,594.1 R34.1 ; v1(1621.22,1050.31) 1621.26,1050.36 R45.1
  L04_BOT w10: P1.8 1212.06,548.87 1596.14,932.94 1596.14,1025.24 v1(1621.22,1050.31)
9PIN_9: P1.9
GND: ANT1.2 ANT1.3 ANT1.4 ANT1.5 C1.1 C2.1 C3.1 C5.2 C6.2 C7.2 C8.1 C9.2 C10.1 C11.2 C12.1 C13.2 C14.1 C15.2 D1.1 D1.2 J1.6 J1.9 J1.14 J1.20 J1.25 J1.30 J1.34 J1.39 J2.2 J2.3 JPPS1.2 JPPS1.3 JPPS1.4 JPPS1.5 P2.7 Q1.2 R25.2 R26.2 R39.2 U1.10 U1.12 U1.13 U1.24 U2.8 U3.4 | length 1536.1
  L01_TOP w10: v1(346.65,1178.32) 348.81,1178.32 358.26,1168.86 C5.2 ; v1(427.85,1687.41) 429.34,1688.9 U3.4 ; v1(553.99,1828.34) 570.03,1812.3 C15.2 ; v1(745.35,1282.13) 745.7,1281.78 745.7,1255.19 C3.1 ; v1(807.17,1696.56) 807.52,1696.91 Q1.2 ; R25.2 1796.11,627.36 1796.11,664.17 v1(1796.39,664.46) ; v1(1797.85,926.98) 1798.39,926.44 R26.2 ; v1(1804.88,1176.52) 1805.21,1176.19 R39.2 ; C14.1 3056.89,1229.25 v1(3075.34,1210.8)
  L01_TOP w15: v1(137.77,1208.21) 150.42,1220.86 D1.1 ; D1.2 234.33,1259.16 v1(234.33,1208.85) ; U1.24 1370.18,1474.18 v1(1392.74,1496.74) ; C2.1 1440.34,1484.09 v1(1440.34,1490.04) ; C1.1 1473.43,1456.1 1473.81,1456.47 1473.81,1472.44 1483.86,1482.49 v1(1483.86,1483.3) ; C6.2@1596.9,1416.08 1617.61,1416.08 v1(1640.22,1393.47) ; v1(2476.53,1229.47) 2484.63,1221.36 C12.1 ; C10.1 2652.86,328.41 2689.09,364.64 2689.09,374.69 v1(2689.67,375.26) ; C8.1 2670.16,559.86 v1(2720.44,610.14) ; C7.2 2747.76,551.65 v1(2748.75,552.64) ; C9.2 2748.41,384.17 v1(2749.19,384.95)
  L01_TOP w20: v1(2462.14,1290.8) 2462.85,1291.51 C11.2 ; v1(2690.26,1057.84) 2690.34,1057.92 U2.8 ; v1(2984.01,1367.2) 2985.41,1368.61 C13.2
  L01_TOP w30: v1(764.35,922.57) 764.78,923 U1.12 ; v1(768.88,1009.6) U1.10 ; U1.13 1386.25,923 v1(1386.95,922.3)
  other v1: 611.62,931.23 676.98,942 643.34,943.39 712.06,945.96 747.22,947.54 552.78,950.46 591.11,954.71 447.19,969.43 527.88,968.58 415.24,972.82 363.87,977.42 480.05,984.99 715.36,986.92 746.03,986.72 637.58,988.1 674.11,988.4 554.77,1009.05 592.6,1016.11 623.66,1016.7 365.02,1020.93 416.66,1024.05 531.28,1028.29 457.13,1033.95
  other v3: 2648.23,1458.66 2748.23,1558.66
GPS_D_SEL: R9.2 U1.2 | length 476.4
  L01_TOP w10: R9.2 479.58,1415.06 518.4,1376.25 669.81,1376.25 724.44,1430.87 U1.2
GPS_EXTINT: R6.2
GPS_LNA_EN: R10.2
GPS_PPS_OUT: R8.2 R20.1 R22.2 R32.2 R45.2 R47.2 | length 6565.5
  L01_TOP w10: v1(337.38,1375.42) 337.74,1375.06 R8.2 ; v1(504.02,746.54) 1349.23,746.54 1642.08,1039.39 1642.08,1116.66 1636.22,1122.51 1627.09,1122.51 1622.24,1127.36 1622.24,1130.3 1620.92,1131.62 1620.92,1171.49 v1(1620.58,1171.83) ; v1(1364.74,542.17) 1364.74,418.18 1370.6,412.33 1951.25,412.33 1978.5,439.58 1978.5,600.78 1952.16,627.12 v1(1924.38,627.12) ; v1(1653.12,927.49) 1653.56,927.05 R32.2 ; R22.2 v1(1924.38,627.12) ; R20.1@2473.55,1593.77 2473.55,1651.04 v1(2508.59,1686.09) ; R47.2 2663.84,845.77 2663.84,879.02 v1(2663.99,879.17)
  L04_BOT w10: v1(337.38,1375.42) 337.38,1289.36 389.07,1237.67 389.07,861.5 v1(504.02,746.54) ; v1(1364.74,542.17) 1380.52,557.96 1380.52,627.7 1653.12,900.3 v1(1653.12,927.49) 1654.65,929.02 1654.65,947.7 1683.72,976.76 1683.72,1108.69 v1(1620.58,1171.83) ; v1(1924.38,627.12) 1922.85,625.59 1922.85,603.4 1858.54,539.09 1858.54,449.24 1947,360.78 2200.24,360.78 2663.99,824.53 v1(2663.99,879.17) 2663.99,942.3 2782.78,1061.08 2782.78,1370.7 2838.23,1426.15 2838.23,1564.78 2716.93,1686.09 v1(2508.59,1686.09)
GPS_RESET_N: R12.2 U1.8 | length 567.6
  L01_TOP w10: v1(764.66,1095.34) 839.94,1095.34 U1.8 ; v1(837.14,844.27) 838.27,845.41 R12.2
  L04_BOT w10: v1(764.66,1095.34) 900.23,1095.34 918.02,1077.54 918.02,899.95 912.16,894.1 886.96,894.1 v1(837.14,844.27)
GPS_RF_IN: C4.2 U1.11 | length 241.4
  L01_TOP w10: C4.2 623.57,966.31 U1.11
GPS_SAFEBOOT_N: R11.2 U1.1 | length 499
  L01_TOP w10: R11.2 461.7,1455.72 526.27,1391.15 578.22,1391.15 586.02,1398.94 663.79,1398.94 737.78,1472.92 839.57,1472.92 U1.1
GPS_SCL: R1.1
GPS_SDA: R3.1
GPS_SMA_RF: ANT1.1 C4.1 L2.2 | length 401.7
  L01_TOP w10: ANT1.1 455.11,999.84 491.8,1036.53 L2.2 493.77,1036.53 546.92,983.38 C4.1
GPS_TIMEPULSE: R8.1 U1.3 | length 455.1
  L01_TOP w10: R8.1 466.42,1375.06 482.31,1359.17 685.89,1359.17 714.3,1387.57 U1.3
GPS_USB_DM: R2.1
GPS_USB_DP: R4.1
GPS_VCC_RF: R13.1 R70.2 | length 327.9
  L01_TOP w10: v1(582.26,1275.41) 582.26,1219.63 R70.2 ; v1(604.52,1057.05) R13.1
  L04_BOT w10: v1(582.26,1275.41) 582.26,1079.31 v1(604.52,1057.05)
NetC5_1: C5.1 L2.1 R14.1 R15.1 R70.1 | length 307
  L01_TOP w10: C5.1 469.56,1168.86 497.79,1140.63 R14.1 ; L2.1 492.79,1130.71 R14.1 ; R15.1 662.86,1140.63 R70.1 R14.1
NetJ1_3: J1.3 R18.1 | length 2412.6
  L01_TOP w10: J1.3 494.33,27.62 2319.22,27.62 2349.09,57.49 2349.09,248.94 2301.61,296.42 R18.1
NetJ1_5: J1.5 R19.1 | length 2274.5
  L01_TOP w10: J1.5 574.03,47.93 2306.2,47.93 2316.7,58.43 2316.7,245.42 2293.59,268.53 2107.4,268.53 2081.16,294.77 R19.1
NetJ1_12: J1.12
NetJ1_16: J1.16
NetJ1_18: J1.18
NetJ1_19: J1.19
NetJ1_21: J1.21
NetJ1_22: J1.22
NetJ1_23: J1.23
NetJ1_24: J1.24
NetJ1_26: J1.26
NetJ1_27: J1.27
NetJ1_28: J1.28
NetJ1_29: J1.29
NetJ1_31: J1.31
NetJ1_32: J1.32
NetJ1_33: J1.33
NetJ1_35: J1.35
NetJ1_36: J1.36
NetJ1_37: J1.37
NetJ1_38: J1.38
NetJ1_40: J1.40
NetJ2_1: J2.1 R21.1 | length 109.8
  L01_TOP w10: R21.1 2644.62,1562.27 J2.1@2648.23,1558.66
NetJ2_4: J2.4 R51.1 | length 228
  L01_TOP w10: R51.1 2738.64,1367.55 2748.23,1377.14 J2.4 v3(2748.23,1458.66)
NetJPPS1_1: JPPS1.1 R50.2 | length 295.7
  L01_TOP w10: R50.2 180.89,1458.31 210.51,1487.94 JPPS1.1
NetP2_1: P2.1
NetP2_2: P2.2 R40.1 | length 839.7
  L01_TOP w10: R40.1 1568.48,1051.06 v1(1568.56,1050.99)
  L04_BOT w10: v1(1568.56,1050.99) 1567.47,1050.99 1434.45,1184 1434.45,1344.05 1712.06,1621.66 P2.2
NetP2_3: P2.3 R42.1 | length 840.2
  L01_TOP w10: v1(1531.77,1049.98) 1532.86,1051.07 R42.1
  L04_BOT w10: v1(1531.77,1049.98) 1477.75,1104 1463.3,1104 1410.81,1156.49 1410.81,1426.28 1424.87,1440.35 1471.46,1440.35 1612.06,1580.95 P2.3
NetP2_4: P2.4
NetQ1_1: Q1.1 R57.1 R58.2 | length 133.6
  L01_TOP w10: R58.2 716.15,1797.14 716.15,1832.62 R57.1 806.64,1834.3 Q1.1
NetR1_2: R1.2 U1.19 | length 100.6
  L01_TOP w10: U1.19 1313.55,1257.92 R1.2
NetR2_2: R2.2 U1.5 | length 452.8
  L01_TOP w10: R2.2 441.84,1301.21 463.13,1322.51 775.86,1322.51 786.66,1311.7 830.09,1311.7 U1.5
NetR3_2: R3.2 U1.18 | length 102.2
  L01_TOP w10: U1.18 1316.33,1217.39 R3.2
NetR4_2: R4.2 U1.6 | length 482.8
  L01_TOP w10: R4.2 441.13,1266.15 481.29,1306.32 761.64,1306.32 784.94,1283.02 784.94,1263.67 790.96,1257.65 U1.6
NetR5_2: R5.2 U1.21 | length 101.5
  L01_TOP w10: U1.21 1315.15,1346.14 R5.2
NetR6_1: R6.1 U1.4 | length 437.9
  L01_TOP w10: R6.1 834.82,1338.25 U1.4
NetR7_2: R7.2 U1.20 | length 102.3
  L01_TOP w10: U1.20 1314.62,1299.61 R7.2
NetR9_1: R9.1
NetR10_1: R10.1 U1.14 | length 97.2
  L01_TOP w10: U1.14 1313.98,965.6 R10.1
NetR11_1: R11.1
NetR13_2: R13.2 U1.9 | length 160.3
  L01_TOP w10: R13.2 836.7,1057.05 U1.9
NetR46_2: R46.2 U2.3 | length 1006.4
  L01_TOP w10: R46.2 2567.71,767.35 2629.81,705.24 2815.29,705.24 3047.41,937.36 3047.41,1171.52 3003.52,1215.41 U2.3
NetR47_1: R47.1 U2.6 | length 600.8
  L01_TOP w10: R47.1 2753.19,812.15 2759.05,818 2759.05,945.4 2698.61,1005.85 2645.81,1005.85 2639.95,1011.71 2639.95,1102.57 2674.05,1136.66 U2.6
NetR48_2: R48.2 U2.4 | length 513.8
  L01_TOP w10: R48.2 2521.8,1046.65 2690.55,1215.41 U2.4
NetR49_1: R49.1 U2.5 | length 755.6
  L01_TOP w10: R49.1 2616.72,810.3 2666.09,760.93 2831.59,760.93 3015.62,944.96 3015.62,1120.92 2999.88,1136.66 U2.5
NetR53_1: R53.1 U3.6 | length 96.1
  L01_TOP w10: U3.6 658.72,1708.58 683.68,1683.62 R53.1
NetR54_2: R54.2 U3.7 | length 449.1
  L01_TOP w10: U3.7 712.61,1728.27 782.43,1658.44 891.48,1658.44 v1(932.8,1699.76) 932.8,1711.85 R54.2
NetR55_1: R55.1 U3.5 | length 70.7
  L01_TOP w10: R55.1 588.63,1650.83 598.85,1661.05 U3.5
NetU1_15: U1.15
NetU1_16: U1.16
NetU1_17: U1.17
NetU2_7: U2.7
P3V3: C1.2 C2.2 C3.2 C6.1 C9.1 C10.2 C11.1 C12.2 C15.1 D1.4 J1.1 J1.17 P2.5 R15.2 R16.1 R17.1 R33.2 R35.2 R38.2 R56.2 R57.2 U1.7 U1.22 U1.23 U2.2 U3.8 | length 1038.5
  L01_TOP w10: C15.1 U3.8 598.97,1748.07 v1(639.39,1748.07) ; v1(649.47,1835.6) 650.77,1834.3 R57.2 ; C3.2 769.54,1199.86 v1(772.67,1199.86) 774.83,1199.86 789.31,1214.34 U1.7 ; R56.2 1036.65,1840.18 v1(1038.32,1838.51) ; v1(1476.75,627.72) 1478.39,626.08 R35.2 ; R33.2 1599.23,627.45 1599.23,664.07 v1(1599.62,664.46) ; R38.2 1859.44,1175.9 v1(1859.79,1176.24) ; v1(1913.1,325.49) 1914.16,326.55 R17.1 ; R16.1 2244.34,327.34 v1(2244.91,326.76) ; C10.2 C10.2@2625.68,226.04
  L01_TOP w15: v1(89.48,1421.94) 142.55,1368.87 D1.4 ; C12.2 2579.82,1221.36 v1(2589.2,1230.74) ; v1(2623.02,163.57) 2623.02,225.73 C10.2 ; C9.1 2750.06,272.82 v1(2750.06,212.89)
  L01_TOP w20: v1(662.73,1280.04) 663.29,1279.48 R15.2 ; C11.1 2674.82,1291.51 v1(2676.27,1292.95) 2677.46,1294.15 U2.2
  other v1: 1377.46,1399.98 1446.25,1401.24
P5V: C7.1 C8.2 C13.1 C14.2 J1.2 J1.4 P2.6 R14.2 R23.2 R24.2 U2.1 | length 8114.4
  L01_TOP w10: R23.2 1833.71,660.65 1833.86,660.8 1892.56,660.8 2003.55,771.79 ; R24.2 1847.29,885.7 1847.29,927.42 1847.61,927.74 1908.13,927.74 1966.01,869.86 1966.01,809.34 2003.55,771.79 ; v1(2422.48,396.89) 2378.45,396.89 2003.55,771.79 ; v1(3008.75,1292.95) 3008.75,1269.48 3014.61,1263.62 3033.69,1263.62 C14.2
  L01_TOP w15: C7.1 2651.2,442.73 C8.2 2578.41,457.5 v1(2530.75,505.16) 2530.75,575.9 2595.7,640.85 2980.81,640.85 3107.62,767.66 3107.62,1299.53 3093.66,1313.49 3083.29,1313.49 ; C13.1 3083.29,1313.49 ; 3092.08,1432.88 3092.08,1322.27 3083.29,1313.49
  L01_TOP w20: v1(502.49,1277.88) 502.71,1277.65 R14.2 ; U2.1 3007.56,1294.15 v1(3008.75,1292.95) 3017.66,1292.95 C13.1
  L01_TOP w30: J1.2 J1.4 ; P2.6 1409.94,1772.52 2911.77,1772.52 3092.08,1592.22 3092.08,1432.88
  L04_BOT w10: v1(2422.48,396.89) v1(2530.75,505.16)
  L04_BOT w30: J1.2 314.96,490.42 474.82,650.28 959.64,650.28 996.37,687.01 996.37,1352.81 989.17,1360.01 ; v1(502.49,1277.88) 584.61,1360.01 989.17,1360.01 ; P2.6 1312.06,1561.04 1111.03,1360.01 989.17,1360.01
RPI_GPIO04: J1.7 R52.1 R58.1 | length 3087.1
  L01_TOP w10: R52.1 488.61,1832.36 513.86,1857.61 594.73,1857.61 627.32,1825.02 627.32,1798.57 v1(675.41,1750.48) 675.41,1752.65 684.36,1761.6 R58.1
  L04_BOT w10: J1.7 566.41,155.55 566.41,239.45 895.79,568.84 1061.33,568.84 1067.19,574.69 1067.19,1056.93 1193.68,1183.42 1193.68,1363.48 1360.34,1530.14 1360.34,1710.2 1320.06,1750.48 v1(675.41,1750.48)
RPI_GPIO17: J1.11 R12.1 R44.2 R48.1 | length 4002.4
  L01_TOP w10: J1.11 775.68,67.72 588.14,67.72 566.41,89.46 566.41,246.14 738.97,418.7 738.97,639.36 650.86,727.46 480.77,727.46 470.98,737.25 470.98,796.25 476.84,802.11 900.49,802.11 918.95,820.57 R12.1 1403.89,845.41 1594.35,1035.87 1594.35,1193.27 1617.97,1216.89 1669.25,1216.89 ; R44.2 1663.39,1211.03 1669.25,1216.89 ; R48.1 2521.8,762.54 v1(2510.41,751.16) 2420.72,840.85 2420.72,962.5 2166.33,1216.89 1669.25,1216.89
RPI_GPIO22: J1.15 R34.2 R43.2 | length 2168.6
  L01_TOP w10: J1.15 963,158.96 691.28,158.96 666.42,183.82 666.42,229.13 1106.06,668.77 1404.64,668.77 1410.25,663.16 v1(1564.17,663.16) ; R34.2 1563.45,662.44 v1(1564.17,663.16) ; R43.2 1708.31,1129.87 1708.31,1174.87 v1(1707.76,1175.42) 1707.55,1175.62 1697.96,1175.62 1683.72,1161.39 1683.72,1019.03 1564.17,899.49 v1(1564.17,663.16)
RPI_GPIO27: J1.13 R31.2 R41.2 | length 3875.7
  L01_TOP w10: J1.13 957.2,64.76 1065.03,64.76 1070.89,70.62 1070.89,281.48 1076.75,287.34 1820.81,287.34 1878.17,344.7 2002.92,344.7 2069.67,411.44 2147.86,411.44 2153.82,405.48 2209.47,405.48 2282.24,332.71 2476.56,332.71 2482.56,338.7 2482.56,507.35 1986.89,1003.02 1986.89,1193.2 1981.03,1199.06 1784.37,1199.06 v1(1760.73,1175.42) ; R31.2 1648.53,662.13 v1(1649.57,663.16) 1608.67,704.07 1608.67,907.07 1681.72,980.13 1688.67,980.13 1734.28,1025.73 1734.28,1167.32 1742.81,1175.85 1760.3,1175.85 v1(1760.73,1175.42) ; R41.2 1760.45,1129.61 1760.45,1175.13 v1(1760.73,1175.42)
RPI_I2C1_SCL: R17.2 R19.2 R36.2 | length 1001
  L01_TOP w10: R36.2 1957.05,1177.21 v1(1957.18,1177.35) ; R17.2@2030.24,327.35 2081.16,327.35 R19.2 2081.16,394.44 v1(2081.65,394.44)
  L04_BOT w10: v1(1957.18,1177.35) 2081.65,1052.88 v1(2081.65,394.44)
RPI_I2C1_SDA: R16.2 R18.2 R37.2 | length 1181.4
  L01_TOP w10: R37.2 1908.24,1175.87 v1(1908.34,1175.97) ; v1(2128.2,393.34) 2128.2,328.22 R16.2@2171.53,328.22
  L04_BOT w10: v1(1908.34,1175.97) 1946.88,1214.5 2075.73,1214.5 2128.2,1162.04 v1(2128.2,393.34)
RPI_SYNC_OUT: R51.2 U3.2 | length 3633.7
  L01_TOP w10: v1(422.12,1754.71) 448.56,1728.27 U3.2 ; v1(2457.37,1382.04) 2457.95,1382.62 2558.74,1382.62 R51.2@2573.42,1367.93
  L04_BOT w10: v1(422.12,1754.71) 467.92,1800.51 1135.33,1800.51 1159.56,1776.28 1438.17,1776.28 1458.11,1756.34 1458.11,1624.64 1423.34,1589.87 1423.34,1486.57 1338.36,1401.59 1338.36,1137.08 1479.6,995.84 1540.05,995.84 1587.18,1042.97 1587.18,1079.57 1485.72,1181.03 1485.72,1376.93 1500.41,1376.93 1540.28,1416.8 2334.11,1416.8 2366.53,1384.38 ; 2366.22,1384.06 2368.24,1382.04 v1(2457.37,1382.04)
RPI_UART_RX: J1.10 R7.1 R29.2 R30.2 R40.2 R46.1 | length 5368.8
  L01_TOP w10: J1.10 878.09,370.13 1953.45,370.13 2019.85,436.52 2214.38,436.52 2298.53,352.37 2443.87,352.37 2449.72,358.23 2449.72,477.62 1967.33,960.01 1733.89,960.01 v1(1701.87,927.99) ; R7.1 1533.14,1299.61 1569.54,1263.21 ; R40.2 1569.01,1129.85 1569.01,1170.47 v1(1569.54,1171) 1569.54,1263.21 ; R30.2@1701.85,885.4 v1(1701.87,927.99) ; R29.2 1705.73,684.73 1682.92,707.54 1641.25,707.54 1628.98,719.82 1628.98,750.35 1634.83,756.21 1670.88,756.21 1676.74,762.07 1676.74,922.38 1683.06,928.7 1701.16,928.7 v1(1701.87,927.99) ; v1(2519.74,1083.36) 2462.77,1083.36 2282.93,1263.21 1569.54,1263.21 ; R46.1 2567.71,883.38 v1(2568.03,883.7)
  L04_BOT w10: v1(1569.54,1171) 1591.81,1193.27 1651.92,1193.27 1732.04,1113.15 1732.04,958.16 v1(1701.87,927.99) ; v1(2519.74,1083.36) 2568.03,1035.07 v1(2568.03,883.7)
RPI_UART_TX: J1.8 R5.1 R27.2 R28.2 R42.2 R49.2 | length 4108.5
  L01_TOP w10: R5.1 1502.2,1346.14 v1(1502.96,1345.39) ; R42.2 1533.4,1129.87 1533.4,1169.08 v1(1533.94,1169.62) ; v1(1650.72,726.98) 1729.86,726.98 1753.28,703.56 R27.2 ; R28.2 1747.65,928.31 v1(1748.09,928.75) ; v1(2616.15,882) 2616.44,881.72 2616.44,845.03 R49.2
  L04_BOT w10: J1.8 778.09,370.13 1385.28,370.13 1461.46,446.31 1461.46,531.41 1509.4,579.36 1509.4,664.46 1543.15,698.2 1641.18,698.2 1650.72,707.75 v1(1650.72,726.98) 1649.19,728.51 1629.25,728.51 1622.96,734.8 1622.96,787.37 1712.24,876.65 1712.24,892.89 v1(1748.09,928.75) 1749.62,930.28 1749.62,1138.1 1725.31,1162.41 1725.31,1221.11 1714.91,1231.5 1536.08,1231.5 1533.94,1233.64 ; v1(1533.94,1169.62) 1533.94,1233.64 ; 1562.89,1368.05 1525.63,1368.05 v1(1502.96,1345.39) 1533.94,1314.4 1533.94,1233.64 ; 1562.89,1368.91 2280.93,1368.91 2616.15,1033.69 v1(2616.15,882)
SMA_IN_EN: Q1.3 R54.1 R56.1 | length 132.2
  L01_TOP w10: Q1.3 963.78,1796.02 R54.1@970.53,1789.26 ; R56.1 970.53,1837.56 R54.1@970.53,1789.26 ; R54.1@970.53,1788.28 R54.1@970.53,1789.26
SMA_OUT_EN: R52.2 U3.1 | length 57.9
  L01_TOP w10: R52.2 458.04,1797.91 474.83,1781.11 U3.1
SMA_SIG: D1.3 R20.2 R21.2 R50.1 R53.2 R55.2 U3.3 | length 2868.1
  L01_TOP w10: D1.3@214.35,1370.63 R50.1 ; D1.3 217.35,1370.63 257.64,1410.92 275.28,1410.92 312.23,1447.87 312.23,1509.89 318.09,1515.75 372.88,1515.75 462.05,1604.92 504.62,1604.92 519.83,1620.13 ; U3.3 417.25,1708.58 416.65,1709.18 390.43,1682.97 390.43,1657.84 397.44,1650.83 R55.2 526.77,1627.06 519.83,1620.13 ; R20.2@2507.01,1593.77 2507.72,1593.06 2507.72,1562.97 R21.2 2357.33,1562.27 2343.24,1576.35 756.49,1576.35 690.49,1642.36 689.5,1642.36 683.68,1648.19 R53.2 627.34,1649.17 598.3,1620.13 519.83,1620.13
pads on no net: U2.0
copper on no net:
  other v2: 578.69,483.32 2960.58,483.32 578.69,1506.94 2960.58,1506.94

## Polygon pours and split planes (outlines as drawn)
P3V3 on L01_TOP "NONET_L-01_P-001" (solid, remove dead copper, pour order 3): 1313.27,1439.42 1560.79,1439.42 1560.79,1392.41 1540.21,1371.82 1313.27,1371.82
GND on L02_PWR "NONET_L-01_P-001" (solid, remove dead copper, pour order 8): -0.47,1876.45 1.84,1874.14 3144.35,1874.14 3144.35,-4.44 3142.04,-2.13 1.84,-2.13 1.84,1878.76 6.46,1883.38
P3V3 on L03_PWR "NONET_L-01_P-001" (solid, remove dead copper, pour order 9): 1.92,1878.5 4.55,1875.87 3149.61,1875.87 3149.61,0 1.92,0 1.92,1876.59 0,1878.5

## Silkscreen, mask and mechanical layers (free items; w line width, h text height)
Top Overlay:
  lines w5: 1493.88,554.32 1493.88,664.46 1900.6,664.46 1900.6,554.32 1493.88,554.32 ; 1505.85,1073.2 1984.19,1073.2 1984.19,1152.01 1505.85,1152.01 1505.85,1073.2 ; 1509.27,575.69 1545.42,575.69 1545.42,646.48 1509.27,646.48 1509.27,575.69 ; 1625.73,829.1 1872.65,829.1 1872.65,908.33 1625.73,908.33 1625.73,829.1 ; 2482.87,786.98 2702.02,786.98 2702.02,869.05 2482.87,869.05 2482.87,786.98
  lines w6.8: 1456.56,711.15 1456.56,686.17 1460.55,682.19 1476.58,682.19 1513.76,645.01
  lines w10: 1168.76,425.82 1168.76,1473.07 1265.89,1473.07 ; 1392.26,1473.07 2255.37,1473.07 2255.37,425.82 ; 712.06,425.82 712.06,1725.82 2312.06,1725.82 2312.06,425.82 712.06,425.82 ; 1010.09,425.82 1010.09,1803.78 2014.03,1803.78 2014.03,425.82 1010.09,425.82
  text "Deegoo-FPV NEO-6M" at 1594.41,1501.44 h40
  text "Sparkfun NEO-M9N" at 2360.84,1460.33 h50 r270
  text "Adafruit Ultimate GPS" at 2042.08,1440.19 h50 r270
  text "Sparkfun NEO-M9N Jumpers" at 1515.77,1194.53 h20
  text "RCB-F9T" at 3009.05,1151.38 h60 r270
  text "Deegoo Jumpers" at 1615.6,945.33 h20
  text "RCB-F9T Jumpers" at 2450.49,895.59 h20
  text "Adafruit Jumpers" at 1558.47,684.27 h20
  text "10K" at 1443.49,663.09 h30 r90
  text "TimePi v1" at 108.06,329.04 h30 r90
Top Solder:
  rectangle: 699.18,1780.69 703.09,1810.22
  rectangle: 541.75,1635.91 545.38,1665.66
  rectangle: 958.11,1767.08 988.14,1770.59
  rectangle: 668.81,1664.45 698.56,1667.58
  rectangle: 443.19,1814.17 472.93,1817.24
  rectangle: 195.61,1411.22 199.79,1440.69
  rectangle: 2648.76,826.47 2678.32,830.49
  rectangle: 2602.17,826.15 2631.54,829.77
  rectangle: 2552.93,826.28 2582.44,829.97
  rectangle: 2507.26,826.54 2536.37,829.77
  rectangle: 1517.9,1109.95 1547.57,1114.43
  rectangle: 1553.77,1110.52 1583.09,1114.93
  rectangle: 1606.94,1110.53 1635.37,1113.88
  rectangle: 1648.31,1110.37 1678.02,1115.32
  rectangle: 1694.32,1110.85 1723.55,1114.92
  rectangle: 1745.27,1110.69 1774.98,1114.28
  rectangle: 1790.8,1110.61 1819.95,1115.8
  rectangle: 1844.79,1110.69 1874.18,1114.44
  rectangle: 1893.59,1110.85 1922.98,1114.92
  rectangle: 1942.15,1110.93 1971.46,1114.36
  rectangle: 1638.66,866.44 1668.49,871.16
  rectangle: 1687.19,866.76 1716.82,870.71
  rectangle: 1732.67,866.11 1762.5,870.97
  rectangle: 1783.79,866.63 1813.55,870.25
  rectangle: 1832.19,866.57 1861.95,870.12
  rectangle: 1548.34,608.25 1577.97,612.9
  rectangle: 1584.17,608.16 1613.71,613.33
  rectangle: 1633.69,607.47 1663.31,612.81
  rectangle: 1691.13,608.42 1720.58,612.81
  rectangle: 1738.32,607.56 1768.38,612.72
  rectangle: 1861.64,608.68 1891,611.95
  rectangle: 1781.55,608.25 1810.66,612.04
  rectangle: 1819.18,608.59 1848.55,612.12
  rectangle: 2487.42,1582.81 2492.86,1612.45
  rectangle: 2112.38,311.14 2141.84,315.47
  rectangle: 2066.36,310.5 2096.18,314.67
  rectangle: 386.52,1251.21 392.57,1280.84
  rectangle: 385.89,1286.27 391.82,1316.15
  rectangle: 385.51,1323.71 392.19,1353.09
  rectangle: 384.38,1360.15 389.93,1390.03
  rectangle: 383.75,1400.25 388.41,1430.13
  rectangle: 383.62,1440.72 388.41,1470.73
  rectangle: 662.52,1042.23 667.92,1071.84
  rectangle: 899.57,830.62 904.87,860.33
  rectangle: 1426.76,1202.51 1433.57,1232.33
  rectangle: 1427.77,1243.13 1433.17,1272.65
  rectangle: 1422.97,950.33 1429.65,980.44
Board Shape:
  the board outline again, w1

## Text inside footprints (layer, text, board x,y; h text height)
P1: Top Overlay "9" at 1119.14,588.23 h40 r180; Top Overlay "1" at 1947.94,589.57 h40 r180